# Altium PCB XEM7310_Breakout.PcbDoc (part 2 of 3)
Units mm, origin at the board's own origin, x right, y up, seen from the top; angles counter-clockwise.
Board outline 151.89 x 165.35 mm, 4 copper layers (Top, Ground Plane, Power Plane, Bottom), stack 1.562 mm thick; 68 components, 204 nets, 832 pads, 382 vias.
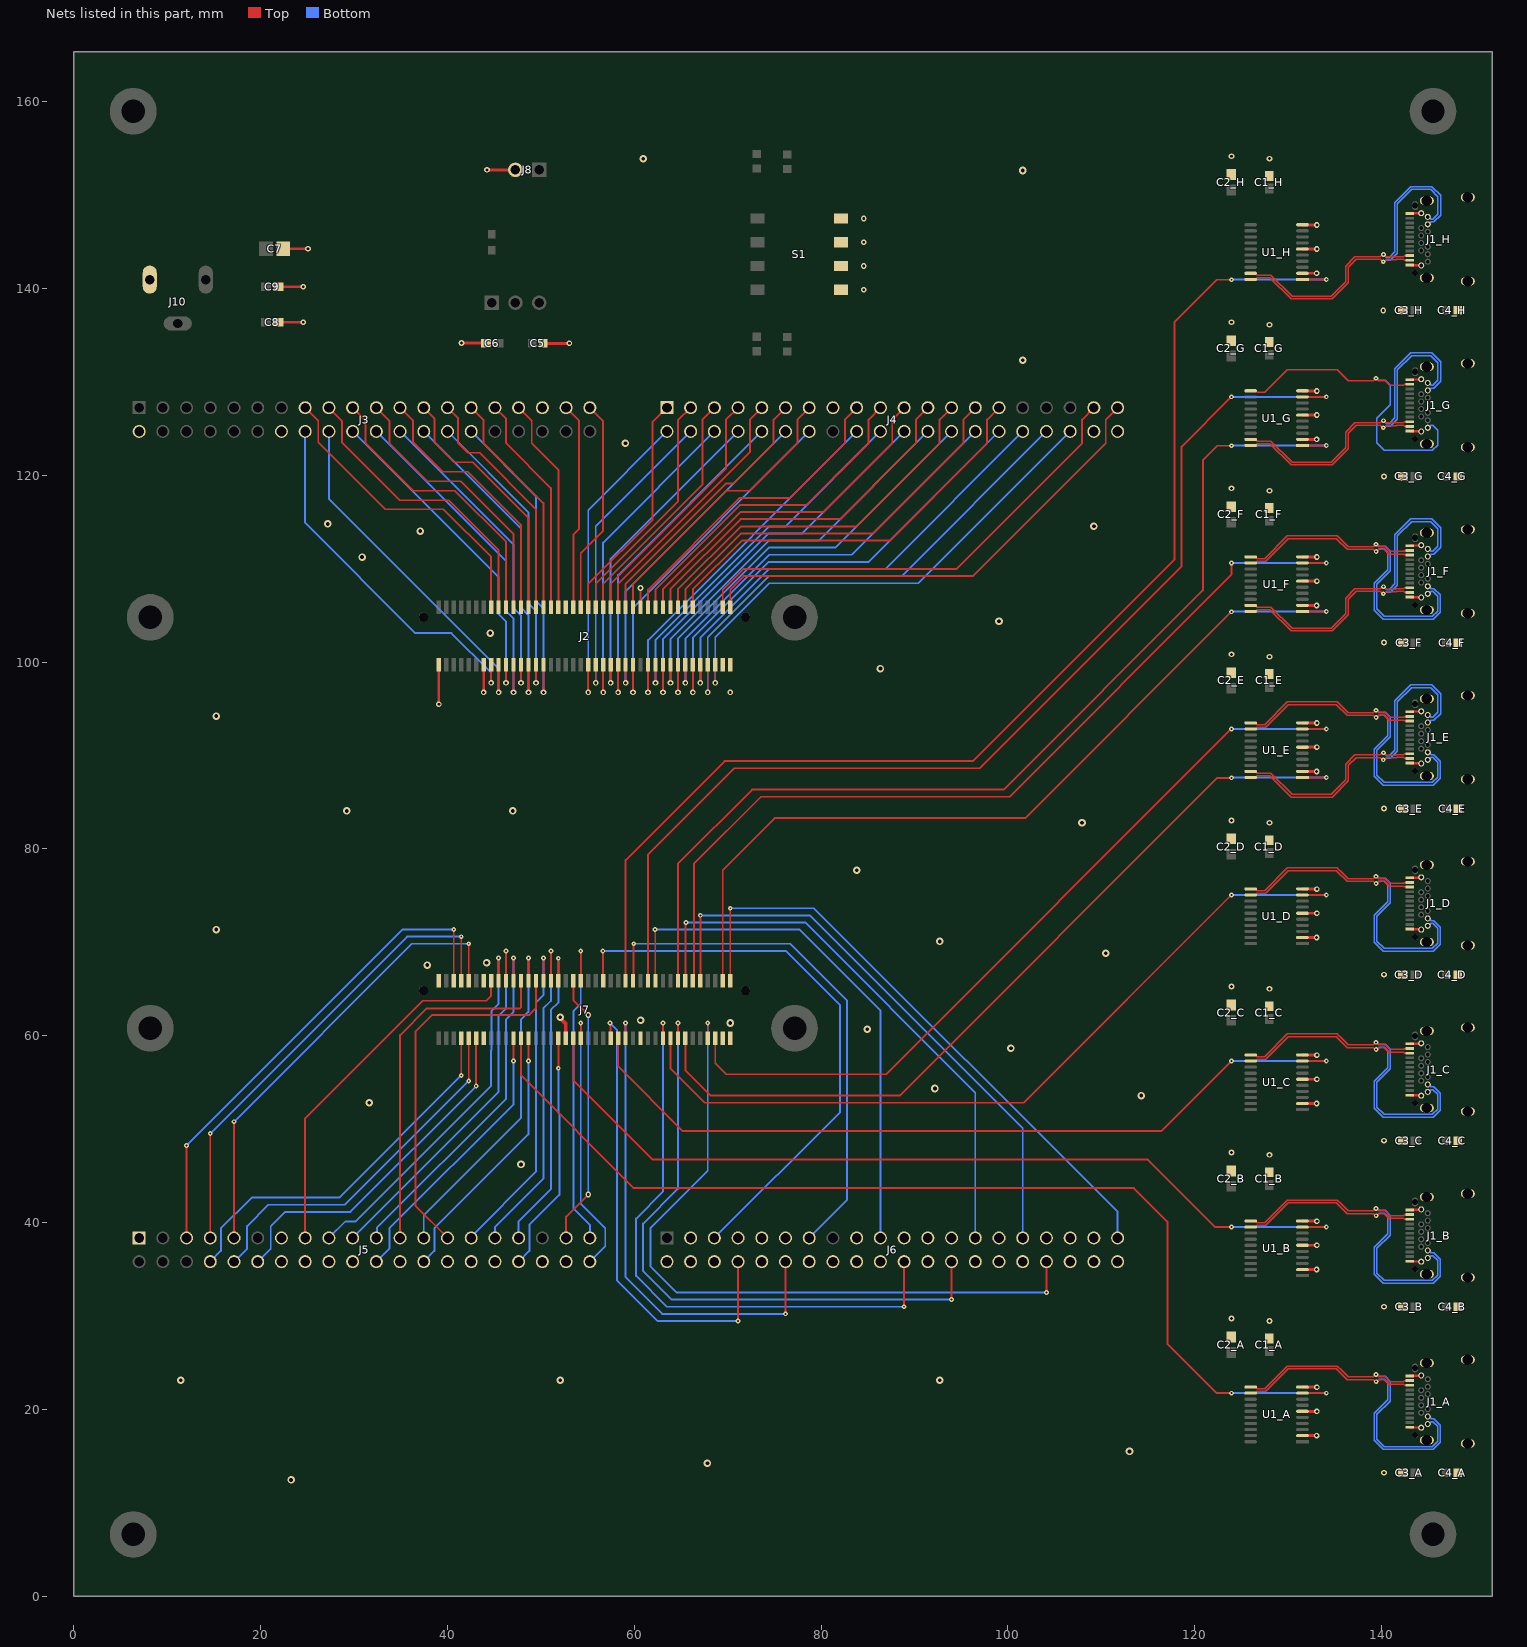
[diagram p4: the nets of this part, all layers, seen from the top]

## Via types
v1: diameter 0.508, hole 0.203, Top to Bottom, 190 vias
v2: diameter 0.61, hole 0.305, Top to Bottom, 154 vias
v3: diameter 0.813, hole 0.406, Top to Bottom, 38 vias

## Nets (pads, with @x,y where several pads share a name; then routed paths per layer and width w, separated by ;. In a path a pad name is that pad's centre, name@x,y a point inside that pad or via, vN(x,y) a via of type N, cw(c..) or ccw(c..) an arc to the next point about the centre after c; other vN are vias at no path point) (continued)
C\S\_E: J7.68 U1_E.1 | length 89.8
  Top w0.203: J7.68@65.477,59.716 65.477,56.32 68.203,53.594 88.408,53.594 122.431,87.617 v1(123.952,87.617) ; U1_E.1@131.553,87.654 v1(134.112,87.654)
  Bottom w0.203: v1(123.952,87.617) 123.97,87.636 134.094,87.636 v1(134.112,87.654)
C\S\_E_N: J1_E.A3 J1_E.B3 U1_E.19 | length 37.8
  Top w0.16: U1_E.19@126.003,88.304 126.559,88.304 126.74,88.123 128.183,88.123 130.454,85.852 134.621,85.852 136.171,87.402 136.171,89.073 137.181,90.083 139.911,90.083 140.138,90.31 140.278,90.31 140.531,90.057 141.487,90.057 141.522,90.092 142.384,90.092 142.475,90.182 143.047,90.182 J1_E.A3@143.063,90.198
  Bottom w0.16: v1(140.229,90.31) 140.28,90.31 140.604,89.986 140.834,89.986 141.445,90.597 141.445,95.877 143.137,97.569 145.407,97.569 146.337,96.639 146.337,94.507 145.635,93.804 145.361,93.804 145.105,93.548 J1_E.B3@144.973,93.548
C\S\_E_P: J1_E.A2 J1_E.B2 U1_E.20 | length 36.8
  Top w0.16: U1_E.20@126.003,87.654 126.559,87.654 126.74,87.836 128.064,87.836 130.335,85.565 134.74,85.565 136.458,87.283 136.458,88.954 137.3,89.796 139.911,89.796 140.159,89.548 140.299,89.548 140.521,89.77 141.606,89.77 141.641,89.804 142.384,89.804 142.475,89.714 143.047,89.714 J1_E.A2@143.063,89.698
  Bottom w0.16: v1(140.208,89.548) 140.302,89.548 140.453,89.699 140.953,89.699 141.732,90.478 141.732,95.758 143.256,97.282 145.288,97.282 146.05,96.52 146.05,94.626 145.516,94.092 145.361,94.092 145.105,94.348 J1_E.B2@144.973,94.348
C\S\_F: J7.77 U1_F.1 | length 90.5
  Top w0.203: J7.77@69.477,65.888 69.477,77.749 75.04,83.312 101.867,83.312 v1(123.952,105.397) ; U1_F.1@131.553,105.434 v1(134.112,105.434)
  Bottom w0.203: v1(123.952,105.397) 123.97,105.416 134.094,105.416 v1(134.112,105.434)
C\S\_F_N: J1_F.A3 J1_F.B3 U1_F.19 | length 37.8
  Top w0.16: U1_F.19@126.003,106.084 126.559,106.084 126.74,105.903 128.183,105.903 130.454,103.632 134.621,103.632 136.171,105.182 136.171,106.853 137.181,107.863 139.911,107.863 140.138,108.09 140.278,108.09 140.531,107.837 141.487,107.837 141.522,107.872 142.384,107.872 142.475,107.962 143.047,107.962 J1_F.A3@143.063,107.978
  Bottom w0.16: v1(140.229,108.09) 140.28,108.09 140.604,107.766 140.834,107.766 141.445,108.377 141.445,113.657 143.137,115.349 145.407,115.349 146.337,114.419 146.337,112.287 145.635,111.584 145.361,111.584 145.105,111.328 J1_F.B3@144.973,111.328
C\S\_F_P: J1_F.A2 J1_F.B2 U1_F.20 | length 36.8
  Top w0.16: U1_F.20@126.003,105.434 126.559,105.434 126.74,105.616 128.064,105.616 130.335,103.345 134.74,103.345 136.458,105.063 136.458,106.734 137.3,107.576 139.911,107.576 140.159,107.328 140.299,107.328 140.521,107.55 141.606,107.55 141.641,107.584 142.384,107.584 142.475,107.494 143.047,107.494 J1_F.A2@143.063,107.478
  Bottom w0.16: v1(140.208,107.328) 140.302,107.328 140.453,107.479 140.953,107.479 141.732,108.258 141.732,113.538 143.256,115.062 145.288,115.062 146.05,114.3 146.05,112.406 145.516,111.872 145.361,111.872 145.105,112.128 J1_F.B2@144.973,112.128
C\S\_G: J7.65 U1_G.1 | length 111.2
  Top w0.203: J7.65@64.677,65.888 64.677,78.405 72.632,86.36 99.568,86.36 120.904,107.696 120.904,121.633 122.449,123.177 v1(123.952,123.177) ; U1_G.1@131.553,123.214 v1(134.112,123.214)
  Bottom w0.203: v1(123.952,123.177) 123.97,123.196 134.094,123.196 v1(134.112,123.214)
C\S\_G_N: J1_G.A3 J1_G.B3 U1_G.19 | length 37.8
  Top w0.16: U1_G.19@126.003,123.864 126.559,123.864 126.74,123.683 128.183,123.683 130.454,121.412 134.621,121.412 136.171,122.962 136.171,124.633 137.181,125.643 139.911,125.643 140.138,125.87 140.278,125.87 140.531,125.617 141.487,125.617 141.522,125.652 142.384,125.652 142.475,125.742 143.047,125.742 J1_G.A3@143.063,125.758
  Bottom w0.16: v1(140.229,125.87) 140.28,125.87 140.604,125.546 140.834,125.546 141.445,126.157 141.445,131.437 143.137,133.129 145.407,133.129 146.337,132.199 146.337,130.067 145.635,129.364 145.361,129.364 145.105,129.108 J1_G.B3@144.973,129.108
C\S\_G_P: J1_G.A2 J1_G.B2 U1_G.20 | length 36.8
  Top w0.16: U1_G.20@126.003,123.214 126.559,123.214 126.74,123.396 128.064,123.396 130.335,121.125 134.74,121.125 136.458,122.843 136.458,124.514 137.3,125.356 139.911,125.356 140.159,125.108 140.299,125.108 140.521,125.33 141.606,125.33 141.641,125.364 142.384,125.364 142.475,125.274 143.047,125.274 J1_G.A2@143.063,125.258
  Bottom w0.16: v1(140.208,125.108) 140.302,125.108 140.453,125.259 140.953,125.259 141.732,126.038 141.732,131.318 143.256,132.842 145.288,132.842 146.05,132.08 146.05,130.186 145.516,129.652 145.361,129.652 145.105,129.908 J1_G.B2@144.973,129.908
C\S\_H: J7.51 U1_H.1 | length 131.2
  Top w0.203: J7.51@59.077,65.888 59.077,78.81 69.675,89.408 96.255,89.408 117.856,111.009 117.856,136.437 122.376,140.957 v1(123.952,140.957) ; U1_H.1@131.553,140.994 v1(134.112,140.994)
  Bottom w0.203: v1(123.952,140.957) 123.97,140.976 134.094,140.976 v1(134.112,140.994)
C\S\_H_N: J1_H.A3 J1_H.B3 U1_H.19 | length 37.8
  Top w0.16: U1_H.19@126.003,141.644 126.559,141.644 126.74,141.463 128.183,141.463 130.454,139.192 134.621,139.192 136.171,140.742 136.171,142.413 137.181,143.423 139.911,143.423 140.138,143.65 140.278,143.65 140.531,143.397 141.487,143.397 141.522,143.432 142.384,143.432 142.475,143.522 143.047,143.522 J1_H.A3@143.063,143.538
  Bottom w0.16: v1(140.229,143.65) 140.28,143.65 140.604,143.326 140.834,143.326 141.445,143.937 141.445,149.217 143.137,150.909 145.407,150.909 146.337,149.979 146.337,147.847 145.635,147.144 145.361,147.144 145.105,146.888 J1_H.B3@144.973,146.888
C\S\_H_P: J1_H.A2 J1_H.B2 U1_H.20 | length 36.8
  Top w0.16: U1_H.20@126.003,140.994 126.559,140.994 126.74,141.176 128.064,141.176 130.335,138.905 134.74,138.905 136.458,140.623 136.458,142.294 137.3,143.136 139.911,143.136 140.159,142.888 140.299,142.888 140.521,143.11 141.606,143.11 141.641,143.144 142.384,143.144 142.475,143.054 143.047,143.054 J1_H.A2@143.063,143.038
  Bottom w0.16: v1(140.208,142.888) 140.302,142.888 140.453,143.039 140.953,143.039 141.732,143.818 141.732,149.098 143.256,150.622 145.288,150.622 146.05,149.86 146.05,147.966 145.516,147.432 145.361,147.432 145.105,147.688 J1_H.B2@144.973,147.688
FPGA_TCK: J5.05 J7.05 | length 53.6
  Top w0.203: J5.05@12.065,38.354 v1(12.065,48.26) ; J7.05@40.677,65.888 v1(40.677,71.374)
  Bottom w0.203: v1(12.065,48.26) 35.179,71.374 v1(40.677,71.374)
FPGA_TDI: J5.09 J7.09 | length 49.4
  Top w0.203: J5.09@17.145,38.354 v1(17.145,50.8) ; J7.09@42.277,65.888 v1(42.277,69.85)
  Bottom w0.203: v1(17.145,50.8) 36.195,69.85 v1(42.277,69.85)
FPGA_TDO: J5.08 J7.08 | length 40.5
  Top w0.203: v1(41.477,55.755) J7.08@41.477,59.716
  Bottom w0.203: J5.08@14.605,35.814 15.748,36.957 15.748,39.37 19.05,42.672 28.394,42.672 v1(41.477,55.755)
FPGA_TMS: J5.07 J7.07 | length 51.5
  Top w0.203: J5.07@14.605,38.354 v1(14.605,49.53) ; J7.07@41.477,65.888 v1(41.477,70.612)
  Bottom w0.203: v1(14.605,49.53) 35.687,70.612 v1(41.477,70.612)
GND: C1_A.2 C1_B.2 C1_C.2 C1_D.2 C1_E.2 C1_F.2 C1_G.2 C1_H.2 C2_A.1 C2_B.1 C2_C.1 C2_D.1 C2_E.1 C2_F.1 C2_G.1 C2_H.1 C3_A.2 C3_B.2 C3_C.2 C3_D.2 C3_E.2 C3_F.2 C3_G.2 C3_H.2 C4_A.2 C4_B.2 C4_C.2 C4_D.2 C4_E.2 C4_F.2 C4_G.2 C4_H.2 C5.2 C6.2 C7.2 C8.2 C9.2 J1_A.1 J1_A.2 J1_A.3 J1_A.4 J1_A.A1 J1_A.A12 J1_A.B1 J1_A.B12 J1_B.1 J1_B.2 J1_B.3 J1_B.4 J1_B.A1 J1_B.A12 J1_B.B1 J1_B.B12 J1_C.1 J1_C.2 J1_C.3 J1_C.4 J1_C.A1 J1_C.A12 J1_C.B1 J1_C.B12 J1_D.1 J1_D.2 J1_D.3 J1_D.4 J1_D.A1 J1_D.A12 J1_D.B1 J1_D.B12 J1_E.1 J1_E.2 J1_E.3 J1_E.4 J1_E.A1 J1_E.A12 J1_E.B1 J1_E.B12 J1_F.1 J1_F.2 J1_F.3 J1_F.4 J1_F.A1 J1_F.A12 J1_F.B1 J1_F.B12 J1_G.1 J1_G.2 J1_G.3 J1_G.4 J1_G.A1 J1_G.A12 J1_G.B1 J1_G.B12 J1_H.1 J1_H.2 J1_H.3 J1_H.4 J1_H.A1 J1_H.A12 J1_H.B1 J1_H.B12 J2.02 J2.14 J2.35 J2.55 J2.78 J2.80 J3.02 J3.14 J3.35 J4.15 J4.38 J4.40 J5.01 J5.13 J5.14 J5.16 J5.18 J5.20 J5.24 J5.28 J5.30 J5.32 J5.36 J5.38 J6.02 J6.03 J6.04 J6.06 J6.07 J6.09 J6.10 J6.11 J6.14 J6.16 J6.17 J6.18 J6.20 J6.21 J6.23 J6.24 J6.25 J6.28 J6.29 J6.30 J6.32 J6.33 J6.35 J6.36 J6.37 J6.38 J6.40 J7.01 J7.13 J7.14 J7.36 J7.56 J7.78 J7.80 J8.2 J10.2 S1.1B S1.2B S1.3B S1.4B U1_A.2 U1_A.6 U1_A.10 U1_B.2 U1_B.6 U1_B.10 U1_C.2 U1_C.6 U1_C.10 U1_D.2 U1_D.6 U1_D.10 U1_E.2 U1_E.6 U1_E.10 U1_F.2 U1_F.6 U1_F.10 U1_G.2 U1_G.6 U1_G.10 U1_H.2 U1_H.6 U1_H.10 | length 83.9
  Top w0.254: v2(39.077,95.504) J2.02@39.077,99.716 ; v2(43.877,96.774) J2.14@43.877,99.716 ; J2.55@60.677,105.888 v2(60.677,107.95) ; J1_A.A1@143.063,18.078 143.086,18.055 144.246,18.055 J1_A.B12@144.273,18.028 ; J1_A.A12@143.063,23.578 143.086,23.601 144.246,23.601 J1_A.B1@144.273,23.628 ; J1_B.A1@143.086,35.835 J1_B.B12@144.246,35.835 ; J1_B.A12@143.086,41.381 J1_B.B1@144.246,41.381 ; J1_C.A1@143.086,53.615 J1_C.B12@144.246,53.615 ; J1_C.A12@143.086,59.161 J1_C.B1@144.246,59.161 ; J1_D.A1@143.086,71.395 J1_D.B12@144.246,71.395 ; J1_D.A12@143.086,76.941 J1_D.B1@144.246,76.941 ; J1_E.A1@143.086,89.175 J1_E.B12@144.246,89.175 ; J1_E.A12@143.086,94.721 J1_E.B1@144.246,94.721 ; J1_F.A1@143.086,106.955 J1_F.B12@144.246,106.955 ; J1_F.A12@143.086,112.501 J1_F.B1@144.246,112.501 ; J1_G.A1@143.086,124.735 J1_G.B12@144.246,124.735 ; J1_G.A12@143.086,130.281 J1_G.B1@144.246,130.281 ; J1_H.A1@143.086,142.515 J1_H.B12@144.246,142.515 ; J1_H.A12@143.086,148.061 J1_H.B1@144.246,148.061
  Top w0.305: C8.2@21.928,136.398 v2(24.553,136.398) ; C9.2@21.928,140.208 v2(24.553,140.208) ; C7.2@22.426,144.272 v2(25.061,144.272) ; v2(41.508,134.176) C6.2@44.133,134.176 ; v2(44.234,152.722) J8.2@47.282,152.722 ; C5.2@50.278,134.133 50.288,134.143 53.046,134.143 v2(53.056,134.152) ; U1_A.2@131.535,17.184 v2(133.077,17.184) ; U1_B.2@131.535,34.964 v2(133.077,34.964) ; U1_C.2@131.535,52.744 v2(133.077,52.744) ; U1_D.2@131.535,70.524 v2(133.077,70.524) ; U1_E.2@131.535,88.304 v2(133.077,88.304) ; U1_F.2@131.535,106.084 v2(133.077,106.084) ; U1_G.2@131.535,123.864 v2(133.077,123.864) ; U1_H.2@131.535,141.644 v2(133.077,141.644) ; U1_A.6@131.553,19.784 v2(133.096,19.784) ; U1_A.10@131.553,22.384 131.56,22.377 133.085,22.377 v2(133.096,22.366) ; U1_B.6@131.553,37.564 v2(133.096,37.564) ; U1_B.10@131.553,40.164 131.56,40.157 133.085,40.157 v2(133.096,40.146) ; U1_C.6@131.553,55.344 v2(133.096,55.344) ; U1_C.10@131.553,57.944 131.56,57.937 133.085,57.937 v2(133.096,57.926) ; U1_D.6@131.553,73.124 v2(133.096,73.124) ; U1_D.10@131.553,75.724 131.56,75.717 133.085,75.717 v2(133.096,75.706) ; U1_E.6@131.553,90.904 v2(133.096,90.904) ; U1_E.10@131.553,93.504 131.56,93.497 133.085,93.497 v2(133.096,93.486) ; U1_F.6@131.553,108.684 v2(133.096,108.684) ; U1_F.10@131.553,111.284 131.56,111.277 133.085,111.277 v2(133.096,111.266) ; U1_G.6@131.553,126.464 v2(133.096,126.464) ; U1_G.10@131.553,129.064 131.56,129.057 133.085,129.057 v2(133.096,129.046) ; U1_H.6@131.553,144.244 v2(133.096,144.244) ; U1_H.10@131.553,146.844 131.56,146.837 133.085,146.837 v2(133.096,146.826)
  Top w0.406: v3(52.07,61.976) 52.07,61.866 52.677,61.259 J7.36@52.677,59.716
  other v2: 140.288,13.208 128.016,29.464 123.952,29.718 140.288,30.988 128.016,47.244 123.952,47.498 140.288,48.768 128.016,65.024 123.952,65.278 140.288,66.548 128.016,82.804 123.952,83.058 140.288,84.328 70.277,96.774 128.016,100.584 123.952,100.838 140.288,102.108 128.016,118.364 123.952,118.618 140.288,119.888 128.016,136.144 123.952,136.398 140.204,137.668 84.582,139.893 84.582,142.433 84.582,144.973 84.582,147.513 128.016,153.924 123.952,154.178
  other v3: 23.258,12.446 67.833,14.224 113.03,15.494 11.43,23.114 52.07,23.114 92.71,23.114 47.879,46.228 31.623,52.832 114.3,53.594 92.202,54.356 100.33,58.674 84.963,60.706 70.277,61.369 60.677,61.671 37.847,67.564 44.196,67.818 110.49,68.834 92.71,70.104 15.24,71.374 83.82,77.724 107.95,82.804 29.21,84.074 46.99,84.074 15.24,94.234 86.36,99.314 44.577,103.124 99.06,104.394 30.861,111.252 37.084,114.046 109.22,114.554 27.178,114.808 59.055,123.444 101.6,132.334 101.6,152.654 60.96,153.924
MC1_15: J2.15 J3.15 | length 33.3
  Top w0.203: J3.15@24.765,127.254 26.162,125.857 26.162,123.557 33.334,116.385 39.573,116.385 44.677,111.281 J2.15@44.677,105.888
MC1_16: J2.16 J3.16 | length 39.4
  Top w0.203: v2(44.677,97.79) J2.16@44.677,99.716
  Bottom w0.203: J3.16@24.765,124.714 24.765,114.935 36.576,103.124 40.423,103.124 44.677,98.87 v2(44.677,97.79)
MC1_17: J2.17 J3.17 | length 32
  Top w0.203: J3.17@27.305,127.254 28.702,125.857 28.702,123.557 34.911,117.348 40.132,117.348 45.477,112.003 J2.17@45.477,105.888
MC1_18: J2.18 J3.18 | length 38.4
  Top w0.203: v2(45.477,96.774) J2.18@45.477,99.716
  Bottom w0.203: J3.18@27.305,124.714 27.305,117.483 45.477,99.311 v2(45.477,96.774)
MC1_19: J2.19 J3.19 | length 30.8
  Top w0.203: J3.19@29.845,127.254 31.242,125.857 31.242,123.444 36.322,118.364 40.794,118.364 46.277,112.881 J2.19@46.277,105.888
MC1_20: J2.20 J3.20 | length 35.7
  Top w0.203: v2(46.277,97.79) J2.20@46.277,99.716
  Bottom w0.203: J3.20@29.845,124.714 45.477,109.082 45.477,105.145 46.277,104.345 v2(46.277,97.79)
MC1_21: J2.21 J3.21 | length 29.5
  Top w0.203: J3.21@32.385,127.254 33.782,125.857 33.782,123.444 37.846,119.38 41.402,119.38 47.077,113.705 J2.21@47.077,105.888
MC1_22: J2.22 J3.22 | length 37
  Top w0.203: v2(47.077,96.774) J2.22@47.077,99.716
  Bottom w0.203: J3.22@32.385,124.714 46.277,110.822 46.277,105.448 47.077,104.648 v2(47.077,96.774)
MC1_23: J2.23 J3.23 | length 28.3
  Top w0.203: J3.23@34.925,127.254 36.322,125.857 36.322,123.557 39.483,120.396 42.164,120.396 47.877,114.683 J2.23@47.877,105.888
MC1_24: J2.24 J3.24 | length 34.2
  Top w0.203: v2(47.877,97.79) J2.24@47.877,99.716
  Bottom w0.203: J3.24@34.925,124.714 47.077,112.562 47.077,105.781 47.877,104.981 v2(47.877,97.79)
MC1_25: J2.25 J3.25 | length 27.2
  Top w0.203: J3.25@37.465,127.254 38.608,126.111 38.608,123.557 40.753,121.412 42.721,121.412 48.677,115.456 J2.25@48.677,105.888
MC1_26: J2.26 J3.26 | length 35.5
  Top w0.203: v2(48.677,96.774) J2.26@48.677,99.716
  Bottom w0.203: J3.26@37.465,124.714 47.877,114.302 47.877,105.851 48.677,105.051 v2(48.677,96.774)
MC1_27: J2.27 J3.27 | length 26
  Top w0.203: J3.27@40.005,127.254 41.148,126.111 41.148,123.47 42.19,122.428 43.434,122.428 49.477,116.385 J2.27@49.477,105.888
MC1_28: J2.28 J3.28 | length 32.8
  Top w0.203: v2(49.477,97.79) J2.28@49.477,99.716
  Bottom w0.203: J3.28@40.005,124.714 48.677,116.042 48.677,106.304 49.477,105.504 v2(49.477,97.79)
MC1_29: J2.29 J3.29 | length 24.6
  Top w0.203: J3.29@42.545,127.254 43.877,125.922 43.877,123.444 50.277,117.044 J2.29@50.277,105.888
MC1_30: J2.30 J3.30 | length 34.1
  Top w0.203: v2(50.277,96.774) J2.30@50.277,99.716
  Bottom w0.203: J3.30@42.545,124.714 49.477,117.782 49.477,106.581 50.277,105.781 v2(50.277,96.774)
MC1_31: J2.31 J3.31 | length 23.8
  Top w0.203: J3.31@45.085,127.254 46.277,126.062 46.277,123.444 51.077,118.644 J2.31@51.077,105.888
MC1_33: J2.33 J3.33 | length 23.1
  Top w0.203: J3.33@47.625,127.254 49.022,125.857 49.022,123.444 51.877,120.589 J2.33@51.877,105.888
MC1_37: J2.37 J3.37 | length 22.2
  Top w0.203: J3.37@52.705,127.254 54.102,125.857 54.102,114.3 53.477,113.675 J2.37@53.477,105.888
MC1_39: J2.39 J3.39 | length 22.9
  Top w0.203: J2.39@54.277,105.888 54.277,111.681 56.642,114.046 56.642,125.857 J3.39@55.245,127.254
MC1_41: J2.41 J4.01 | length 24.9
  Top w0.203: J2.41@55.077,105.888 55.077,108.382 61.976,115.281 61.976,125.73 J4.01@63.5,127.254
MC1_42: J2.42 J4.02 | length 34.4
  Top w0.203: v2(55.077,96.774) J2.42@55.077,99.716
  Bottom w0.203: v2(55.077,96.774) 55.077,116.291 J4.02@63.5,124.714
MC1_43: J2.43 J4.03 | length 25.6
  Top w0.203: J2.43@55.877,105.888 55.877,108.382 64.677,117.182 64.677,125.891 J4.03@66.04,127.254
MC1_44: J2.44 J4.04 | length 33.1
  Top w0.203: v2(55.877,97.79) J2.44@55.877,99.716
  Bottom w0.203: v2(55.877,97.79) 55.877,114.551 J4.04@66.04,124.714
MC1_45: J2.45 J4.05 | length 26.3
  Top w0.203: J2.45@56.677,105.888 56.677,108.382 67.31,119.015 67.31,125.984 J4.05@68.58,127.254
MC1_46: J2.46 J4.06 | length 35.8
  Top w0.203: v2(56.677,96.774) J2.46@56.677,99.716
  Bottom w0.203: v2(56.677,96.774) 56.677,112.811 J4.06@68.58,124.714
MC1_47: J2.47 J4.07 | length 27
  Top w0.203: J2.47@57.477,105.888 57.477,108.391 69.821,120.735 69.821,125.955 J4.07@71.12,127.254
MC1_48: J2.48 J4.08 | length 34.5
  Top w0.203: v2(57.477,97.79) J2.48@57.477,99.716
  Bottom w0.203: v2(57.477,97.79) 57.477,111.071 J4.08@71.12,124.714
MC1_49: J2.49 J4.09 | length 27.7
  Top w0.203: J2.49@58.277,105.888 58.277,108.382 72.39,122.495 72.39,125.984 J4.09@73.66,127.254
MC1_50: J2.50 J4.10 | length 37.3
  Top w0.203: v2(58.277,96.774) J2.50@58.277,99.716
  Bottom w0.203: v2(58.277,96.774) 58.277,109.331 J4.10@73.66,124.714
MC1_51: J2.51 J4.11 | length 28.9
  Top w0.203: J2.51@59.077,105.888 59.077,108.382 69.821,119.126 70.612,119.126 74.93,123.444 74.93,125.984 J4.11@76.2,127.254
MC1_52: J2.52 J4.12 | length 35.9
  Top w0.203: v2(59.077,97.79) J2.52@59.077,99.716
  Bottom w0.203: v2(59.077,97.79) 59.077,107.591 J4.12@76.2,124.714
MC1_53: J2.53 J4.13 | length 30.7
  Top w0.203: J2.53@59.877,105.888 59.877,108.391 69.85,118.364 72.39,118.364 77.47,123.444 77.47,125.984 J4.13@78.74,127.254
MC1_54: J2.54 J4.14 | length 38.7
  Top w0.203: v2(59.877,96.774) J2.54@59.877,99.716
  Bottom w0.203: v2(59.877,96.774) 59.877,105.851 J4.14@78.74,124.714
MC1_57: J2.57 J4.17 | length 33.8
  Top w0.203: J2.57@61.477,105.888 61.477,107.785 71.294,117.602 76.708,117.602 82.55,123.444 82.55,125.984 J4.17@83.82,127.254
MC1_58: J2.58 J4.18 | length 40.1
  Top w0.203: v2(61.477,96.774) J2.58@61.477,99.716
  Bottom w0.203: v2(61.477,96.774) 61.477,102.371 J4.18@83.82,124.714
MC1_59: J2.59 J4.19 | length 35.5
  Top w0.203: J2.59@62.277,105.888 62.277,107.785 71.332,116.84 78.486,116.84 85.09,123.444 85.09,125.984 J4.19@86.36,127.254
MC1_60: J2.60 J4.20 | length 39.8
  Top w0.203: v2(62.277,97.79) J2.60@62.277,99.716
  Bottom w0.203: v2(62.277,97.79) 62.277,102.369 74.462,114.554 76.2,114.554 J4.20@86.36,124.714
MC1_61: J2.61 J4.21 | length 37.3
  Top w0.203: J2.61@63.077,105.888 63.077,107.793 71.362,116.078 80.264,116.078 87.63,123.444 87.63,125.984 J4.21@88.9,127.254
MC1_62: J2.62 J4.22 | length 43.7
  Top w0.203: v2(63.077,96.774) J2.62@63.077,99.716
  Bottom w0.203: v2(63.077,96.774) 63.077,102.447 74.422,113.792 77.978,113.792 J4.22@88.9,124.714
MC1_63: J2.63 J4.23 | length 39
  Top w0.203: J2.63@63.877,105.888 63.877,107.793 71.4,115.316 82.042,115.316 90.17,123.444 90.17,125.984 J4.23@91.44,127.254
MC1_64: J2.64 J4.24 | length 43.4
  Top w0.203: v2(63.877,97.79) J2.64@63.877,99.716
  Bottom w0.203: v2(63.877,97.79) 63.877,102.485 74.422,113.03 79.756,113.03 J4.24@91.44,124.714
MC1_65: J2.65 J4.25 | length 40.8
  Top w0.203: J2.65@64.677,105.888 64.677,107.793 71.438,114.554 83.82,114.554 92.71,123.444 92.71,125.984 J4.25@93.98,127.254
MC1_66: J2.66 J4.26 | length 47.2
  Top w0.203: v2(64.677,96.774) J2.66@64.677,99.716
  Bottom w0.203: v2(64.677,96.774) 64.677,102.523 74.422,112.268 81.534,112.268 J4.26@93.98,124.714
MC1_67: J2.67 J4.27 | length 42.5
  Top w0.203: J2.67@65.477,105.888 65.477,107.793 71.476,113.792 85.598,113.792 95.25,123.444 95.25,125.984 J4.27@96.52,127.254
MC1_68: J2.68 J4.28 | length 46.9
  Top w0.203: v2(65.477,97.79) J2.68@65.477,99.716
  Bottom w0.203: v2(65.477,97.79) 65.477,102.527 74.456,111.506 83.312,111.506 J4.28@96.52,124.714
MC1_69: J2.69 J4.29 | length 44.2
  Top w0.203: J2.69@66.277,105.888 66.277,107.793 71.514,113.03 87.376,113.03 97.79,123.444 97.79,125.984 J4.29@99.06,127.254
MC1_70: J2.70 J4.30 | length 50.7
  Top w0.203: v2(66.277,96.774) J2.70@66.277,99.716
  Bottom w0.203: v2(66.277,96.774) 66.277,102.599 74.422,110.744 85.09,110.744 J4.30@99.06,124.714
MC1_72: J2.72 J4.32 | length 50.4
  Top w0.203: v2(67.077,97.79) J2.72@67.077,99.716
  Bottom w0.203: v2(67.077,97.79) 67.077,102.637 74.422,109.982 86.868,109.982 J4.32@101.6,124.714
MC1_74: J2.74 J4.34 | length 54.2
  Top w0.203: v2(67.877,96.774) J2.74@67.877,99.716
  Bottom w0.203: v2(67.877,96.774) 67.877,102.675 74.422,109.22 88.646,109.22 J4.34@104.14,124.714
MC1_76: J2.76 J4.36 | length 53.9
  Top w0.203: v2(68.677,97.79) J2.76@68.677,99.716
  Bottom w0.203: v2(68.677,97.79) 68.677,102.673 74.462,108.458 90.424,108.458 J4.36@106.68,124.714
MC1_77: J2.77 J4.37 | length 51.2
  Top w0.203: J2.77@69.477,105.888 69.477,107.785 71.674,109.982 94.488,109.982 107.95,123.444 107.95,125.984 J4.37@109.22,127.254
MC1_79: J2.79 J4.39 | length 52.9
  Top w0.203: J2.79@70.277,105.888 70.277,107.785 71.712,109.22 96.266,109.22 110.49,123.444 110.49,125.984 J4.39@111.76,127.254
MC2_10: J5.10 J7.10 | length 39.1
  Top w0.203: v1(42.277,55.159) J7.10@42.277,59.716
  Bottom w0.203: J5.10@17.145,35.814 18.542,37.211 18.542,39.624 20.828,41.91 29.028,41.91 v1(42.277,55.159)
MC2_12: J5.12 J7.12 | length 37.7
  Top w0.203: v1(43.077,54.61) J7.12@43.077,59.716
  Bottom w0.203: J5.12@19.685,35.814 21.082,37.211 21.082,39.624 22.606,41.148 29.615,41.148 v1(43.077,54.61)
MC2_15: J5.15 J7.15 | length 39.8
  Top w0.203: J5.15@24.765,38.354 24.765,51.172 37.347,63.754 44.131,63.754 44.677,64.3 J7.15@44.677,65.888
MC2_17: J5.17 J7.17 | length 40.6
  Top w0.203: J7.17@45.477,65.888 v1(45.477,68.326)
  Bottom w0.203: J5.17@27.305,38.354 29.083,40.132 30.161,40.132 44.677,54.648 44.677,58.42 44.704,58.447 44.704,62.648 45.477,63.421 v1(45.477,68.326)
MC2_19: J5.19 J7.19 | length 40.7
  Top w0.203: J7.19@46.277,65.888 v1(46.277,69.082)
  Bottom w0.203: J5.19@29.845,38.354 45.477,53.986 45.477,62.124 46.277,62.924 v1(46.277,69.082)
MC2_21: J5.21 J7.21 | length 38.5
  Top w0.203: J7.21@47.077,65.888 v1(47.077,68.326)
  Bottom w0.203: J5.21@32.385,38.354 32.455,38.424 32.455,39.43 46.277,53.252 46.277,61.771 47.077,62.571 v1(47.077,68.326)
MC2_22: J5.22 J7.22 | length 30
  Top w0.203: v1(47.077,57.299) J7.22@47.077,59.716
  Bottom w0.203: J5.22@32.385,35.814 33.782,37.211 33.782,39.37 47.077,52.665 v1(47.077,57.299)
MC2_23: J5.23 J7.23 | length 38.7
  Top w0.203: J5.23@34.925,38.354 34.925,60.071 37.793,62.939 47.758,62.939 47.877,63.058 J7.23@47.877,65.888
MC2_25: J5.25 J7.25 | length 37.1
  Top w0.203: J7.25@48.677,65.888 v1(48.677,68.326)
  Bottom w0.203: J5.25@37.465,38.354 37.465,40.806 47.877,51.218 47.877,61.751 48.677,62.551 v1(48.677,68.326)
MC2_27: J5.27 J7.27 | length 40.4
  Top w0.203: J5.27@40.005,38.354 36.576,41.783 36.576,60.452 38.354,62.23 48.768,62.23 49.477,62.939 J7.27@49.477,65.888
MC2_29: J5.29 J7.29 | length 35.6
  Top w0.203: J7.29@50.277,65.888 v1(50.277,68.326)
  Bottom w0.203: J5.29@42.545,38.354 42.545,38.504 49.477,45.436 49.477,63.561 50.277,64.361 v1(50.277,68.326)
MC2_31: J5.31 J7.31 | length 36.4
  Top w0.203: J7.31@51.077,65.888 v1(51.077,69.082)
  Bottom w0.203: J5.31@45.085,38.354 45.085,39.497 50.277,44.689 50.277,62.924 51.077,63.724 v1(51.077,69.082)
MC2_33: J5.33 J7.33 | length 34.1
  Top w0.203: J7.33@51.877,65.888 v1(51.877,68.306)
  Bottom w0.203: J5.33@47.625,38.354 47.625,40.132 51.077,43.584 51.077,62.761 51.877,63.561 v1(51.877,68.306)
MC2_34: J5.34 J7.34 | length 25.8
  Top w0.203: v1(51.877,56.519) J7.34@51.877,59.716
  Bottom w0.203: J5.34@47.625,35.814 48.768,36.957 48.768,39.741 51.982,42.955 51.982,51.638 51.877,51.743 v1(51.877,56.519)
MC2_37: J5.37 J7.37 | length 29.2
  Top w0.203: J5.37@52.705,38.354 52.705,40.63 v2(55.077,43.002) ; J7.37@53.477,65.888 53.477,63.83 v2(55.077,62.23)
  Bottom w0.203: v2(55.077,43.002) v2(55.077,62.23)
MC2_39: J5.39 J7.39 | length 35
  Top w0.203: J7.39@54.277,65.888 v1(54.277,69.088)
  Bottom w0.203: v1(54.277,69.088) 54.277,63.421 53.477,62.621 53.477,41.519 55.245,39.751 J5.39@55.245,38.354
MC2_45: J6.05 J7.45 | length 61.5
  Top w0.203: v1(56.642,69.088) 56.66,69.07 56.66,65.906 J7.45@56.677,65.888
  Bottom w0.203: v1(56.642,69.088) 76.2,69.088 82.042,63.246 82.042,51.816 J6.05@68.58,38.354
MC2_48: J6.08 J7.48 | length 50.7
  Top w0.203: v1(57.404,61.369) 57.441,61.332 57.441,59.753 J7.48@57.477,59.716 ; v1(71.12,29.464) J6.08@71.12,35.814
  Bottom w0.203: v1(57.404,61.369) 58.166,60.607 58.166,33.782 62.484,29.464 v1(71.12,29.464)
MC2_59: J6.19 J7.59 | length 57.6
  Top w0.203: v1(62.23,71.374) 62.254,71.35 62.254,65.912 J7.59@62.277,65.888
  Bottom w0.203: v1(62.23,71.374) 77.724,71.374 86.36,62.738 J6.19@86.36,38.354
MC2_62: J6.22 J7.62 | length 64.8
  Top w0.203: J7.62@63.077,59.716 v1(63.077,61.369) ; v1(88.9,30.988) J6.22@88.9,35.814
  Bottom w0.203: v1(63.077,61.369) 63.077,43.294 60.198,40.415 60.198,34.29 63.5,30.988 v1(88.9,30.988)
MC2_71: J6.31 J7.71 | length 62.7
  Top w0.203: J7.71@67.077,65.888 v1(67.077,72.898)
  Bottom w0.203: v1(67.077,72.898) 78.804,72.898 101.6,50.102 J6.31@101.6,38.354
MC2_74: J6.34 J7.74 | length 77.1
  Top w0.203: J7.74@67.877,59.716 v1(67.877,61.369) ; v1(104.14,32.512) J6.34@104.14,35.814
  Bottom w0.203: v1(67.877,61.369) 67.877,45.525 61.722,39.37 61.722,35.306 64.516,32.512 v1(104.14,32.512)
MISO_A1: J7.24 U1_A.9 | length 114.5
  Top w0.203: J7.24@47.877,59.716 47.877,55.755 59.944,43.688 113.505,43.688 117.094,40.099 117.094,27.035 122.395,21.734 v1(123.952,21.734) ; U1_A.9@131.553,21.734 v1(134.112,21.734)
  Bottom w0.203: v1(123.952,21.734) v1(134.112,21.734)
MISO_A2: J5.26 J7.26 | length 28.5
  Top w0.203: v1(48.677,57.299) J7.26@48.677,59.716
  Bottom w0.203: J5.26@37.465,35.814 38.608,36.957 38.608,39.37 48.677,49.439 v1(48.677,57.299)
MISO_A_N: J1_A.A11 J1_A.B11 U1_A.11 | length 37.8
  Top w0.16: U1_A.11@126.003,22.384 126.559,22.384 126.74,22.203 127.513,22.203 129.941,24.631 135.298,24.631 135.466,24.463 135.585,24.344 136.459,23.47 139.128,23.47 139.392,23.733 v1(139.432,23.733) ; v1@139.446,23.683 139.526,23.683 139.738,23.471 140.428,23.471 140.927,22.972 142.384,22.972 142.475,23.062 143.047,23.062 J1_A.A11@143.063,23.078
  Bottom w0.16: v1(139.432,23.733) 139.476,23.733 v1@139.526,23.683 ; v1@139.433,23.701 139.549,23.701 139.734,23.515 140.414,23.515 140.957,22.972 140.957,20.885 139.526,19.454 139.526,16.803 140.314,16.016 145.456,16.016 146.017,16.577 146.017,18.183 145.516,18.684 145.361,18.684 145.105,18.428 J1_A.B11@144.973,18.428
MISO_A_P: J1_A.A10 J1_A.B10 U1_A.12 | length 38.6
  Top w0.16: U1_A.12@126.003,21.734 126.559,21.734 126.74,21.916 127.632,21.916 130.06,24.344 135.179,24.344 136.34,23.183 139.152,23.183 139.375,22.959 v1(139.449,22.959) ; v1@139.451,22.972 139.526,22.972 139.738,23.184 140.309,23.184 140.808,22.684 142.384,22.684 142.475,22.594 143.047,22.594 J1_A.A10@143.063,22.578
  Bottom w0.16: v1(139.449,22.959) 139.489,22.959 139.758,23.228 140.295,23.228 140.67,22.853 140.67,21.004 139.239,19.573 139.239,16.684 140.195,15.728 145.575,15.728 146.304,16.458 146.304,18.302 145.635,18.972 145.361,18.972 145.105,19.228 J1_A.B10@144.973,19.228
MISO_B1: J7.38 U1_B.9 | length 94.2
  Top w0.203: J7.38@53.477,59.716 53.477,55.235 61.976,46.736 115.006,46.736 122.228,39.514 v1(123.952,39.514) ; U1_B.9@131.553,39.514 v1(134.112,39.514)
  Bottom w0.203: v1(123.952,39.514) v1(134.112,39.514)
MISO_B2: J5.40 J7.40 | length 29
  Top w0.203: J7.40@54.277,59.716 v1(54.277,61.369)
  Bottom w0.203: v1(54.277,61.369) 54.277,41.989 56.896,39.37 56.896,37.465 J5.40@55.245,35.814
MISO_B_N: J1_B.A11 J1_B.B11 U1_B.11 | length 37.8
  Top w0.16: U1_B.11@126.003,40.164 126.559,40.164 126.74,39.983 127.513,39.983 129.941,42.411 135.298,42.411 135.466,42.243 135.585,42.124 136.459,41.25 139.128,41.25 139.392,41.513 v1(139.432,41.513) ; v1@139.446,41.463 139.526,41.463 139.738,41.251 140.428,41.251 140.927,40.752 142.384,40.752 142.475,40.842 143.047,40.842 J1_B.A11@143.063,40.858
  Bottom w0.16: v1(139.432,41.513) 139.476,41.513 v1@139.526,41.463 ; v1@139.433,41.481 139.549,41.481 139.734,41.295 140.414,41.295 140.957,40.752 140.957,38.665 139.526,37.234 139.526,34.583 140.314,33.796 145.456,33.796 146.017,34.357 146.017,35.963 145.516,36.464 145.361,36.464 145.105,36.208 J1_B.B11@144.973,36.208
MISO_B_P: J1_B.A10 J1_B.B10 U1_B.12 | length 38.6
  Top w0.16: U1_B.12@126.003,39.514 126.559,39.514 126.74,39.696 127.632,39.696 130.06,42.124 135.179,42.124 136.34,40.963 139.152,40.963 139.375,40.739 v1(139.449,40.739) ; v1@139.451,40.752 139.526,40.752 139.738,40.964 140.309,40.964 140.808,40.464 142.384,40.464 142.475,40.374 143.047,40.374 J1_B.A10@143.063,40.358
  Bottom w0.16: v1(139.449,40.739) 139.489,40.739 139.758,41.008 140.295,41.008 140.67,40.633 140.67,38.784 139.239,37.353 139.239,34.464 140.195,33.508 145.575,33.508 146.304,34.238 146.304,36.082 145.635,36.752 145.361,36.752 145.105,37.008 J1_B.B10@144.973,37.008
MISO_C1: J7.50 U1_C.9 | length 87.4
  Top w0.203: J7.50@58.277,59.716 58.277,56.718 65.211,49.784 116.442,49.784 v1(123.952,57.294) ; U1_C.9@131.553,57.294 v1(134.112,57.294)
  Bottom w0.203: v1(123.952,57.294) v1(134.112,57.294)
MISO_C2: J6.12 J7.52 | length 53.2
  Top w0.203: J7.52@59.077,59.716 v1(59.077,61.369) ; v1(76.2,30.226) J6.12@76.2,35.814
  Bottom w0.203: v1(59.077,61.369) 59.077,34.141 62.992,30.226 v1(76.2,30.226)
MISO_C_N: J1_C.A11 J1_C.B11 U1_C.11 | length 37.8
  Top w0.16: U1_C.11@126.003,57.944 126.559,57.944 126.74,57.763 127.513,57.763 129.941,60.191 135.298,60.191 135.466,60.023 135.585,59.904 136.459,59.03 139.128,59.03 139.392,59.293 v1(139.432,59.293) ; v1@139.446,59.243 139.526,59.243 139.738,59.031 140.428,59.031 140.927,58.532 142.384,58.532 142.475,58.622 143.047,58.622 J1_C.A11@143.063,58.638
  Bottom w0.16: v1(139.432,59.293) 139.476,59.293 v1@139.526,59.243 ; v1@139.433,59.261 139.549,59.261 139.734,59.075 140.414,59.075 140.957,58.532 140.957,56.445 139.526,55.014 139.526,52.363 140.314,51.576 145.456,51.576 146.017,52.137 146.017,53.743 145.516,54.244 145.361,54.244 145.105,53.988 J1_C.B11@144.973,53.988
MISO_C_P: J1_C.A10 J1_C.B10 U1_C.12 | length 38.6
  Top w0.16: U1_C.12@126.003,57.294 126.559,57.294 126.74,57.476 127.632,57.476 130.06,59.904 135.179,59.904 136.34,58.743 139.152,58.743 139.375,58.519 v1(139.449,58.519) ; v1@139.451,58.532 139.526,58.532 139.738,58.744 140.309,58.744 140.808,58.244 142.384,58.244 142.475,58.154 143.047,58.154 J1_C.A10@143.063,58.138
  Bottom w0.16: v1(139.449,58.519) 139.489,58.519 139.758,58.788 140.295,58.788 140.67,58.413 140.67,56.564 139.239,55.133 139.239,52.244 140.195,51.288 145.575,51.288 146.304,52.018 146.304,53.862 145.635,54.532 145.361,54.532 145.105,54.788 J1_C.B10@144.973,54.788
MISO_D1: J7.64 U1_D.9 | length 86.7
  Top w0.203: J7.64@63.877,59.716 63.877,56.519 67.564,52.832 101.71,52.832 v1(123.952,75.074) ; U1_D.9@131.553,75.074 v1(134.112,75.074)
  Bottom w0.203: v1(123.952,75.074) v1(134.112,75.074)
MISO_D2: J6.26 J7.66 | length 68.1
  Top w0.203: J7.66@64.677,59.716 v1(64.677,61.369) ; v1(93.98,31.75) J6.26@93.98,35.814
  Bottom w0.203: v1(64.677,61.369) 64.677,43.595 60.96,39.878 60.96,34.798 64.008,31.75 v1(93.98,31.75)
MISO_D_N: J1_D.A11 J1_D.B11 U1_D.11 | length 37.8
  Top w0.16: U1_D.11@126.003,75.724 126.559,75.724 126.74,75.543 127.513,75.543 129.941,77.971 135.298,77.971 135.466,77.803 135.585,77.684 136.459,76.81 139.128,76.81 139.392,77.073 v1(139.432,77.073) ; v1@139.446,77.023 139.526,77.023 139.738,76.811 140.428,76.811 140.927,76.312 142.384,76.312 142.475,76.402 143.047,76.402 J1_D.A11@143.063,76.418
  Bottom w0.16: v1(139.432,77.073) 139.476,77.073 v1@139.526,77.023 ; v1@139.433,77.041 139.549,77.041 139.734,76.855 140.414,76.855 140.957,76.312 140.957,74.225 139.526,72.794 139.526,70.143 140.314,69.356 145.456,69.356 146.017,69.917 146.017,71.523 145.516,72.024 145.361,72.024 145.105,71.768 J1_D.B11@144.973,71.768
MISO_D_P: J1_D.A10 J1_D.B10 U1_D.12 | length 38.6
  Top w0.16: U1_D.12@126.003,75.074 126.559,75.074 126.74,75.256 127.632,75.256 130.06,77.684 135.179,77.684 136.34,76.523 139.152,76.523 139.375,76.299 v1(139.449,76.299) ; v1@139.451,76.312 139.526,76.312 139.738,76.524 140.309,76.524 140.808,76.024 142.384,76.024 142.475,75.934 143.047,75.934 J1_D.A10@143.063,75.918
  Bottom w0.16: v1(139.449,76.299) 139.489,76.299 139.758,76.568 140.295,76.568 140.67,76.193 140.67,74.344 139.239,72.913 139.239,70.024 140.195,69.068 145.575,69.068 146.304,69.798 146.304,71.642 145.635,72.312 145.361,72.312 145.105,72.568 J1_D.B10@144.973,72.568
MISO_E1: J7.76 U1_E.9 | length 86.5
  Top w0.203: J7.76@68.677,59.716 68.677,57.053 69.85,55.88 86.978,55.88 v1(123.952,92.854) ; U1_E.9@131.553,92.854 v1(134.112,92.854)
  Bottom w0.203: v1(123.952,92.854) v1(134.112,92.854)
MISO_E2: J6.39 J7.79 | length 65.5
  Top w0.203: J7.79@70.277,65.888 v1(70.277,73.66)
  Bottom w0.203: v1(70.277,73.66) 79.248,73.66 111.76,41.148 J6.39@111.76,38.354
MISO_E_N: J1_E.A11 J1_E.B11 U1_E.11 | length 37.8
  Top w0.16: U1_E.11@126.003,93.504 126.559,93.504 126.74,93.323 127.513,93.323 129.941,95.751 135.298,95.751 135.466,95.583 135.585,95.464 136.459,94.59 139.128,94.59 139.392,94.853 v1(139.432,94.853) ; v1@139.446,94.803 139.526,94.803 139.738,94.591 140.428,94.591 140.927,94.092 142.384,94.092 142.475,94.182 143.047,94.182 J1_E.A11@143.063,94.198
  Bottom w0.16: v1(139.432,94.853) 139.476,94.853 v1@139.526,94.803 ; v1@139.433,94.821 139.549,94.821 139.734,94.635 140.414,94.635 140.957,94.092 140.957,92.005 139.526,90.574 139.526,87.923 140.314,87.136 145.456,87.136 146.017,87.697 146.017,89.303 145.516,89.804 145.361,89.804 145.105,89.548 J1_E.B11@144.973,89.548
MISO_E_P: J1_E.A10 J1_E.B10 U1_E.12 | length 38.6
  Top w0.16: U1_E.12@126.003,92.854 126.559,92.854 126.74,93.036 127.632,93.036 130.06,95.464 135.179,95.464 136.34,94.303 139.152,94.303 139.375,94.079 v1(139.449,94.079) ; v1@139.451,94.092 139.526,94.092 139.738,94.304 140.309,94.304 140.808,93.804 142.384,93.804 142.475,93.714 143.047,93.714 J1_E.A10@143.063,93.698
  Bottom w0.16: v1(139.449,94.079) 139.489,94.079 139.758,94.348 140.295,94.348 140.67,93.973 140.67,92.124 139.239,90.693 139.239,87.804 140.195,86.848 145.575,86.848 146.304,87.578 146.304,89.422 145.635,90.092 145.361,90.092 145.105,90.348 J1_E.B10@144.973,90.348
MISO_F1: J7.69 U1_F.9 | length 96.9
  Top w0.203: J7.69@66.277,65.888 66.382,65.993 66.382,78.405 73.575,85.598 100.188,85.598 123.952,109.362 v1(123.952,110.634) ; U1_F.9@131.553,110.634 v1(134.112,110.634)
  Bottom w0.203: v1(123.952,110.634) v1(134.112,110.634)
MISO_F2: J6.27 J7.67 | length 60.4
  Top w0.203: J7.67@65.477,65.888 65.505,65.916 65.505,72.109 v1(65.532,72.136)
  Bottom w0.203: v1(65.532,72.136) 78.296,72.136 96.52,53.912 J6.27@96.52,38.354
MISO_F_N: J1_F.A11 J1_F.B11 U1_F.11 | length 37.8
  Top w0.16: U1_F.11@126.003,111.284 126.559,111.284 126.74,111.103 127.513,111.103 129.941,113.531 135.298,113.531 135.466,113.363 135.585,113.244 136.459,112.37 139.128,112.37 139.392,112.633 v1(139.432,112.633) ; v1@139.446,112.583 139.526,112.583 139.738,112.371 140.428,112.371 140.927,111.872 142.384,111.872 142.475,111.962 143.047,111.962 J1_F.A11@143.063,111.978
  Bottom w0.16: v1(139.432,112.633) 139.476,112.633 v1@139.526,112.583 ; v1@139.433,112.601 139.549,112.601 139.734,112.415 140.414,112.415 140.957,111.872 140.957,109.785 139.526,108.354 139.526,105.703 140.314,104.916 145.456,104.916 146.017,105.477 146.017,107.083 145.516,107.584 145.361,107.584 145.105,107.328 J1_F.B11@144.973,107.328
MISO_F_P: J1_F.A10 J1_F.B10 U1_F.12 | length 38.6
  Top w0.16: U1_F.12@126.003,110.634 126.559,110.634 126.74,110.816 127.632,110.816 130.06,113.244 135.179,113.244 136.34,112.083 139.152,112.083 139.375,111.859 v1(139.449,111.859) ; v1@139.451,111.872 139.526,111.872 139.738,112.084 140.309,112.084 140.808,111.584 142.384,111.584 142.475,111.494 143.047,111.494 J1_F.A10@143.063,111.478
  Bottom w0.16: v1(139.449,111.859) 139.489,111.859 139.758,112.128 140.295,112.128 140.67,111.753 140.67,109.904 139.239,108.473 139.239,105.584 140.195,104.628 145.575,104.628 146.304,105.358 146.304,107.202 145.635,107.872 145.361,107.872 145.105,108.128 J1_F.B10@144.973,108.128
MISO_G1: J7.57 U1_G.9 | length 116.5
  Top w0.203: J7.57@61.477,65.888 61.477,79.432 70.691,88.646 96.98,88.646 118.618,110.284 118.618,123.08 v1(123.952,128.414) ; U1_G.9@131.553,128.414 v1(134.112,128.414)
  Bottom w0.203: v1(123.952,128.414) v1(134.112,128.414)
MISO_G2: J6.13 J7.53 | length 56.5
  Top w0.203: J7.53@59.877,65.888 59.911,65.922 59.911,69.817 v1(59.944,69.85)
  Bottom w0.203: v1(59.944,69.85) 76.708,69.85 82.804,63.754 82.804,42.418 J6.13@78.74,38.354
MISO_G_N: J1_G.A11 J1_G.B11 U1_G.11 | length 37.8
  Top w0.16: U1_G.11@126.003,129.064 126.559,129.064 126.74,128.883 127.513,128.883 129.941,131.311 135.298,131.311 135.466,131.143 135.585,131.024 136.459,130.15 139.128,130.15 139.392,130.413 v1(139.432,130.413) ; v1@139.446,130.363 139.526,130.363 139.738,130.151 140.428,130.151 140.927,129.652 142.384,129.652 142.475,129.742 143.047,129.742 J1_G.A11@143.063,129.758
  Bottom w0.16: v1(139.432,130.413) 139.476,130.413 v1@139.526,130.363 ; v1@139.433,130.381 139.549,130.381 139.734,130.195 140.414,130.195 140.957,129.652 140.957,127.565 139.526,126.134 139.526,123.483 140.314,122.696 145.456,122.696 146.017,123.257 146.017,124.863 145.516,125.364 145.361,125.364 145.105,125.108 J1_G.B11@144.973,125.108